# EAGLE board lv2-debug-cable (EAGLE 4.09)
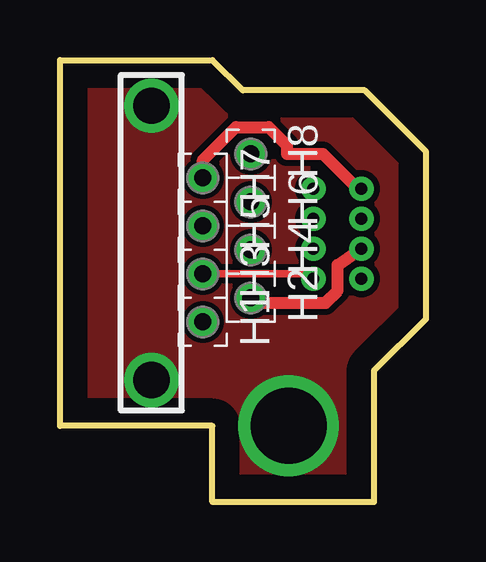
[diagram p0: board, top side]
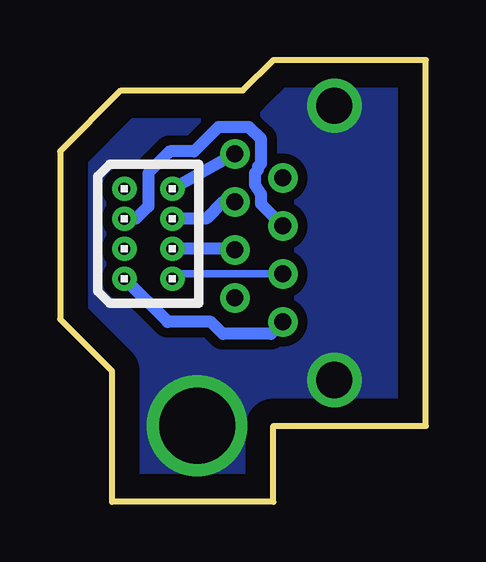
[diagram p1: board, bottom side, seen from below]

Size 15.24 x 18.41 mm. Coordinates in mm from the lower left corner, seen from the top.
Outline: 6.35,0 6.35,3.17 0,3.17 0,18.41 6.35,18.41 7.62,17.14 12.7,17.14 15.24,14.61 15.24,7.62 13.08,5.46 13.08,0 6.35,0
Copper layers used: Top, Bottom

## Footprints (pad centres in the part's own frame; a part is rotated, then mirrored left to right if it is on the bottom)
JST-08P-JED = drill 0.508 pad 1.016 round: 1 -1.875,1; 2 -1.875,-1; 3 -0.625,1; 4 -0.625,-1; 5 0.625,1; 6 0.625,-1; 7 1.875,1; 8 1.875,-1
1MM/0.028 = drill 0.711 round: PAD 0,0

## Placement (x,y rotation side)
CM1  CONN_JED_PLUG_8_VERTICAL  [JST-08P-JED]  11.56,11.18 90 bottom
H1  PAD_0.028  [1MM/0.028]  5.95,7.5 270 top
H2  PAD_0.028  [1MM/0.028]  7.95,8.5 270 top
H3  PAD_0.028  [1MM/0.028]  5.95,9.5 270 top
H4  PAD_0.028  [1MM/0.028]  7.95,10.5 270 top
H5  PAD_0.028  [1MM/0.028]  5.95,11.5 270 top
H6  PAD_0.028  [1MM/0.028]  7.95,12.5 270 top
H7  PAD_0.028  [1MM/0.028]  5.95,13.5 270 top
H8  PAD_0.028  [1MM/0.028]  7.95,14.5 270 top

## Library data of the parts
CM1 H1-H8 = psas_eagle_library

## Nets
W1/VPP/MCLR\: CM1.1 H1.PAD
W2/GND: CM1.2 H3.PAD
W3/5V: CM1.3 H2.PAD
W4/NC: CM1.4 H4.PAD
W5/PGD/RB7: CM1.5 H5.PAD
W6/PGC/RB6: CM1.6 H6.PAD
W7/RX/RC7: CM1.7 H7.PAD
W8/TX/RC6: CM1.8 H8.PAD

## Tracks (layer width: path | path; a pad name or v marks a point on that pad's centre or on a via)
GND  (via drill 1.51, 3.17)
  other vias: 3.81,16.51 3.81,5.08 9.53,3.17
  pour Top (isolate 0.254, no thermals): 13.08,0 6.35,0 6.35,3.17 0,3.17 0,18.41 6.35,18.41 7.62,17.14 12.7,17.14 15.24,14.61 15.24,7.62 13.08,5.46
  pour Bottom (isolate 0.406, no thermals): 0,18.41 6.35,18.41 7.62,17.14 12.7,17.14 15.24,14.61 15.24,7.62 13.08,5.46 13.08,0 6.35,0 6.35,3.17 0,3.17
W1/VPP/MCLR\
  Bottom 0.508: 10.76,7.5 CM1.1 | 10.76,7.5 10.75,7.5 | 10.76,7.5 8.95,7.5 8.45,7 6.45,7 H1.PAD
W2/GND
  Top 0.305: 10.4,9.5 9,9.5 6.39,9.5 H3.PAD
  Bottom 0.305: CM1.2 10.26,9.5 6.31,9.5 H3.PAD
W3/5V
  Top 0.508: CM1.3 11.57,9.86 11.57,8.81 11.06,8.3 8.15,8.3 H2.PAD
W4/NC
  Bottom 0.508: CM1.4 8,10.55 H4.PAD
W5/PGD/RB7
  Bottom 0.508: CM1.5 12.07,11.8 11.56,12.32 11.56,13.72 10.67,14.61 9.65,14.61 8.64,15.62 7.37,15.62 6.86,15.11 6.86,14.1 6.99,13.97 6.99,13.84 7.11,13.72 7.11,13.21 6.86,12.83 6.86,12.41 H5.PAD
W6/PGC/RB6
  Bottom 0.508: H6.PAD 8.45,12.5 9.15,11.8 CM1.6
W7/RX/RC7
  Top 0.508: CM1.7 12.4,13.05 10.95,14.5 9.45,14.5 9.45,14.87 8.7,15.62 7.32,15.62 5.95,14.25 H7.PAD
W8/TX/RC6
  Bottom 0.508: H8.PAD CM1.8